# Altium PCB Layer.PcbDoc
Units mm, origin at the board's own origin, x right, y up, seen from the top; angles counter-clockwise.
Board outline 88 x 88 mm, 2 copper layers (Top Layer, Bottom Layer); 50 components, 28 nets, 154 pads, 84 vias.
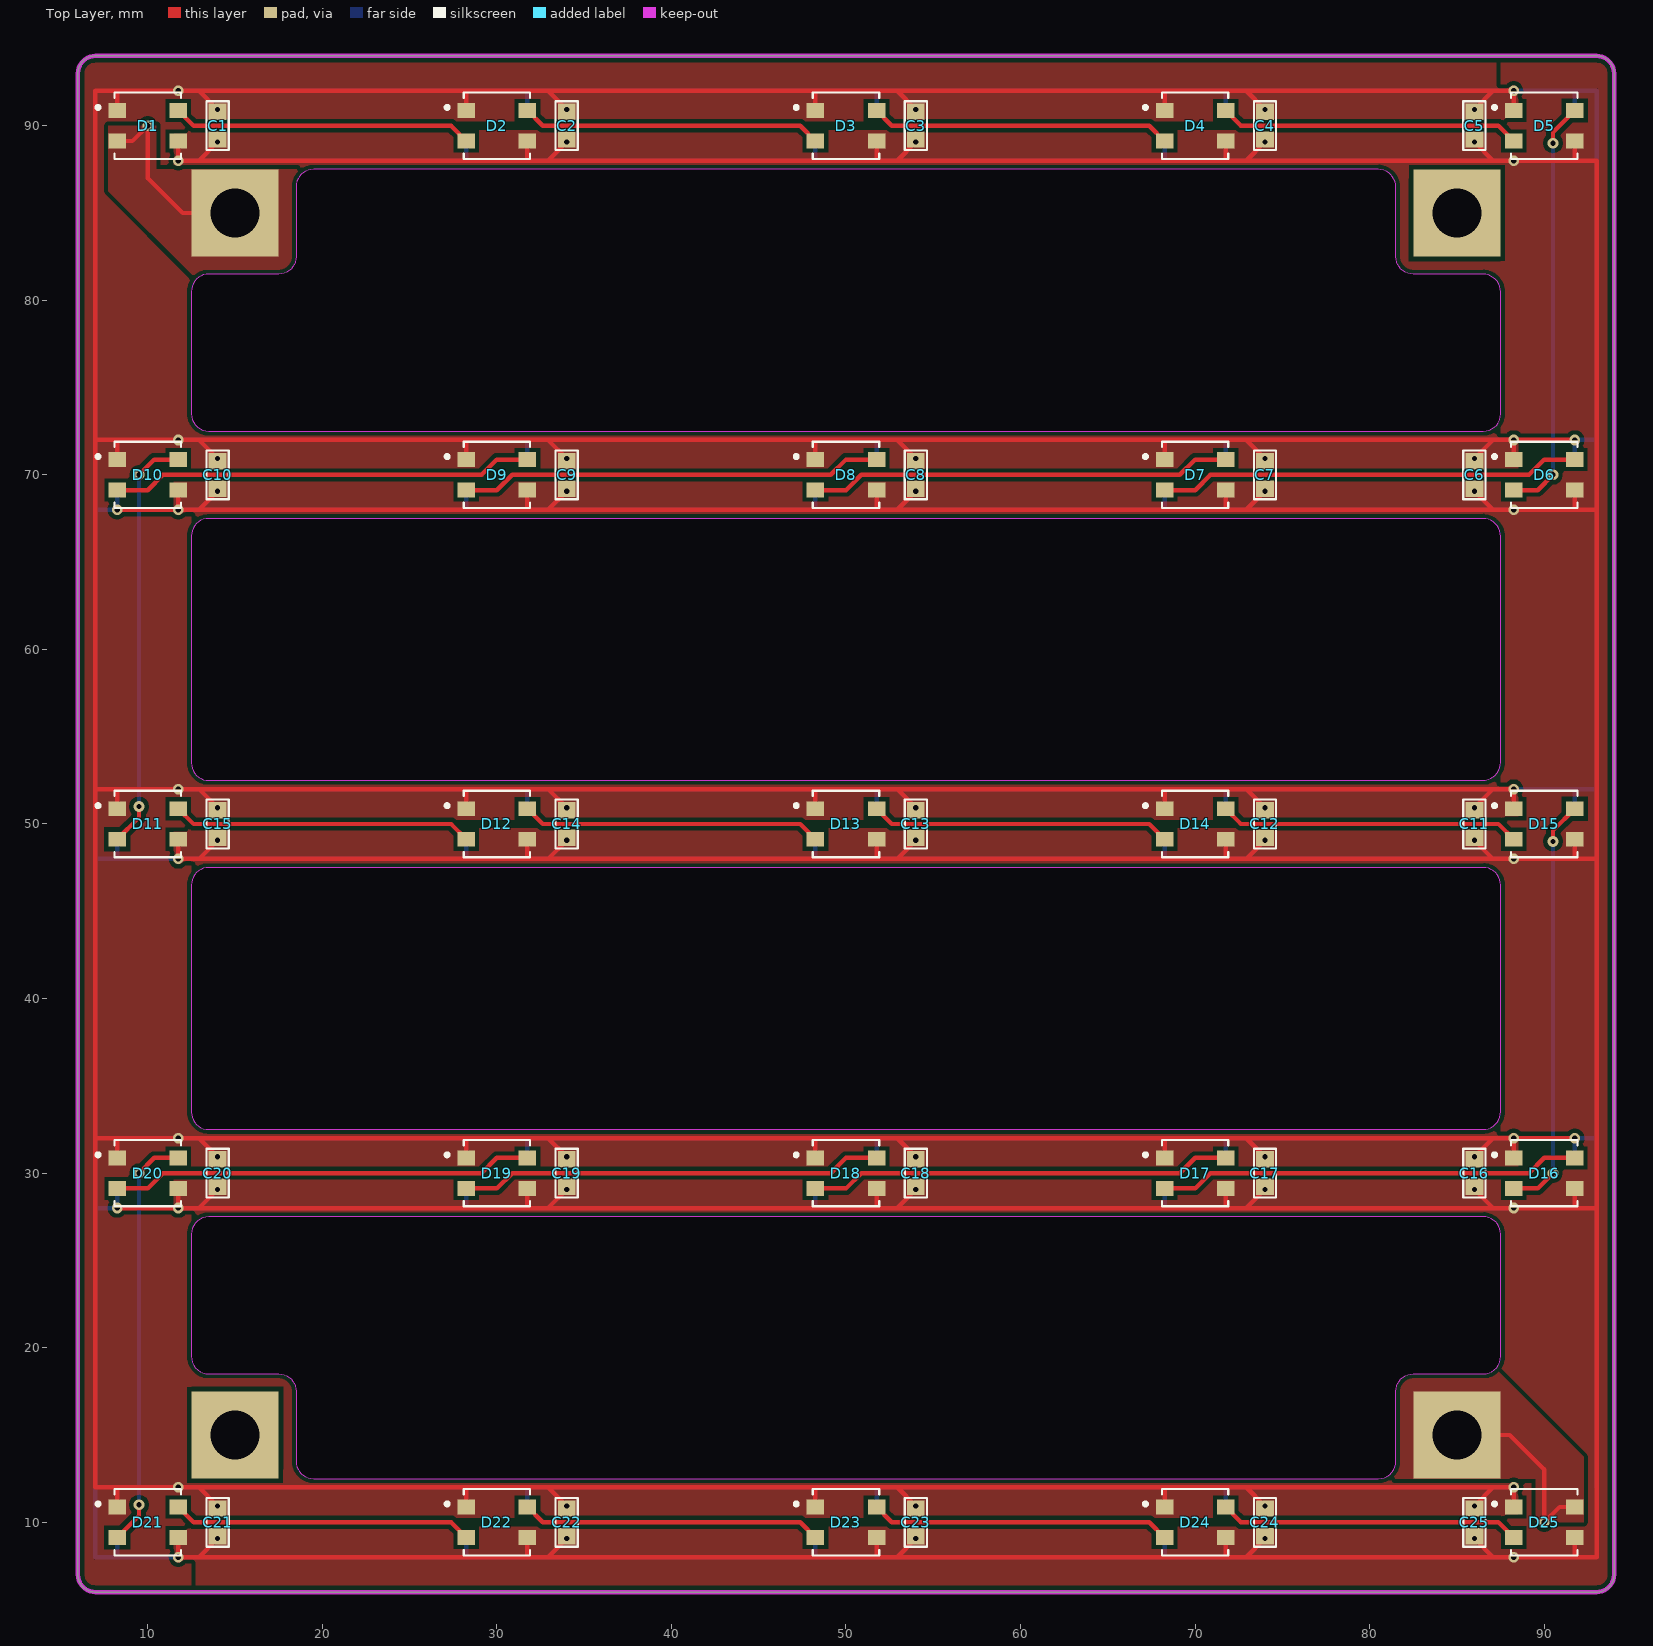
[diagram p0: Top Layer view]
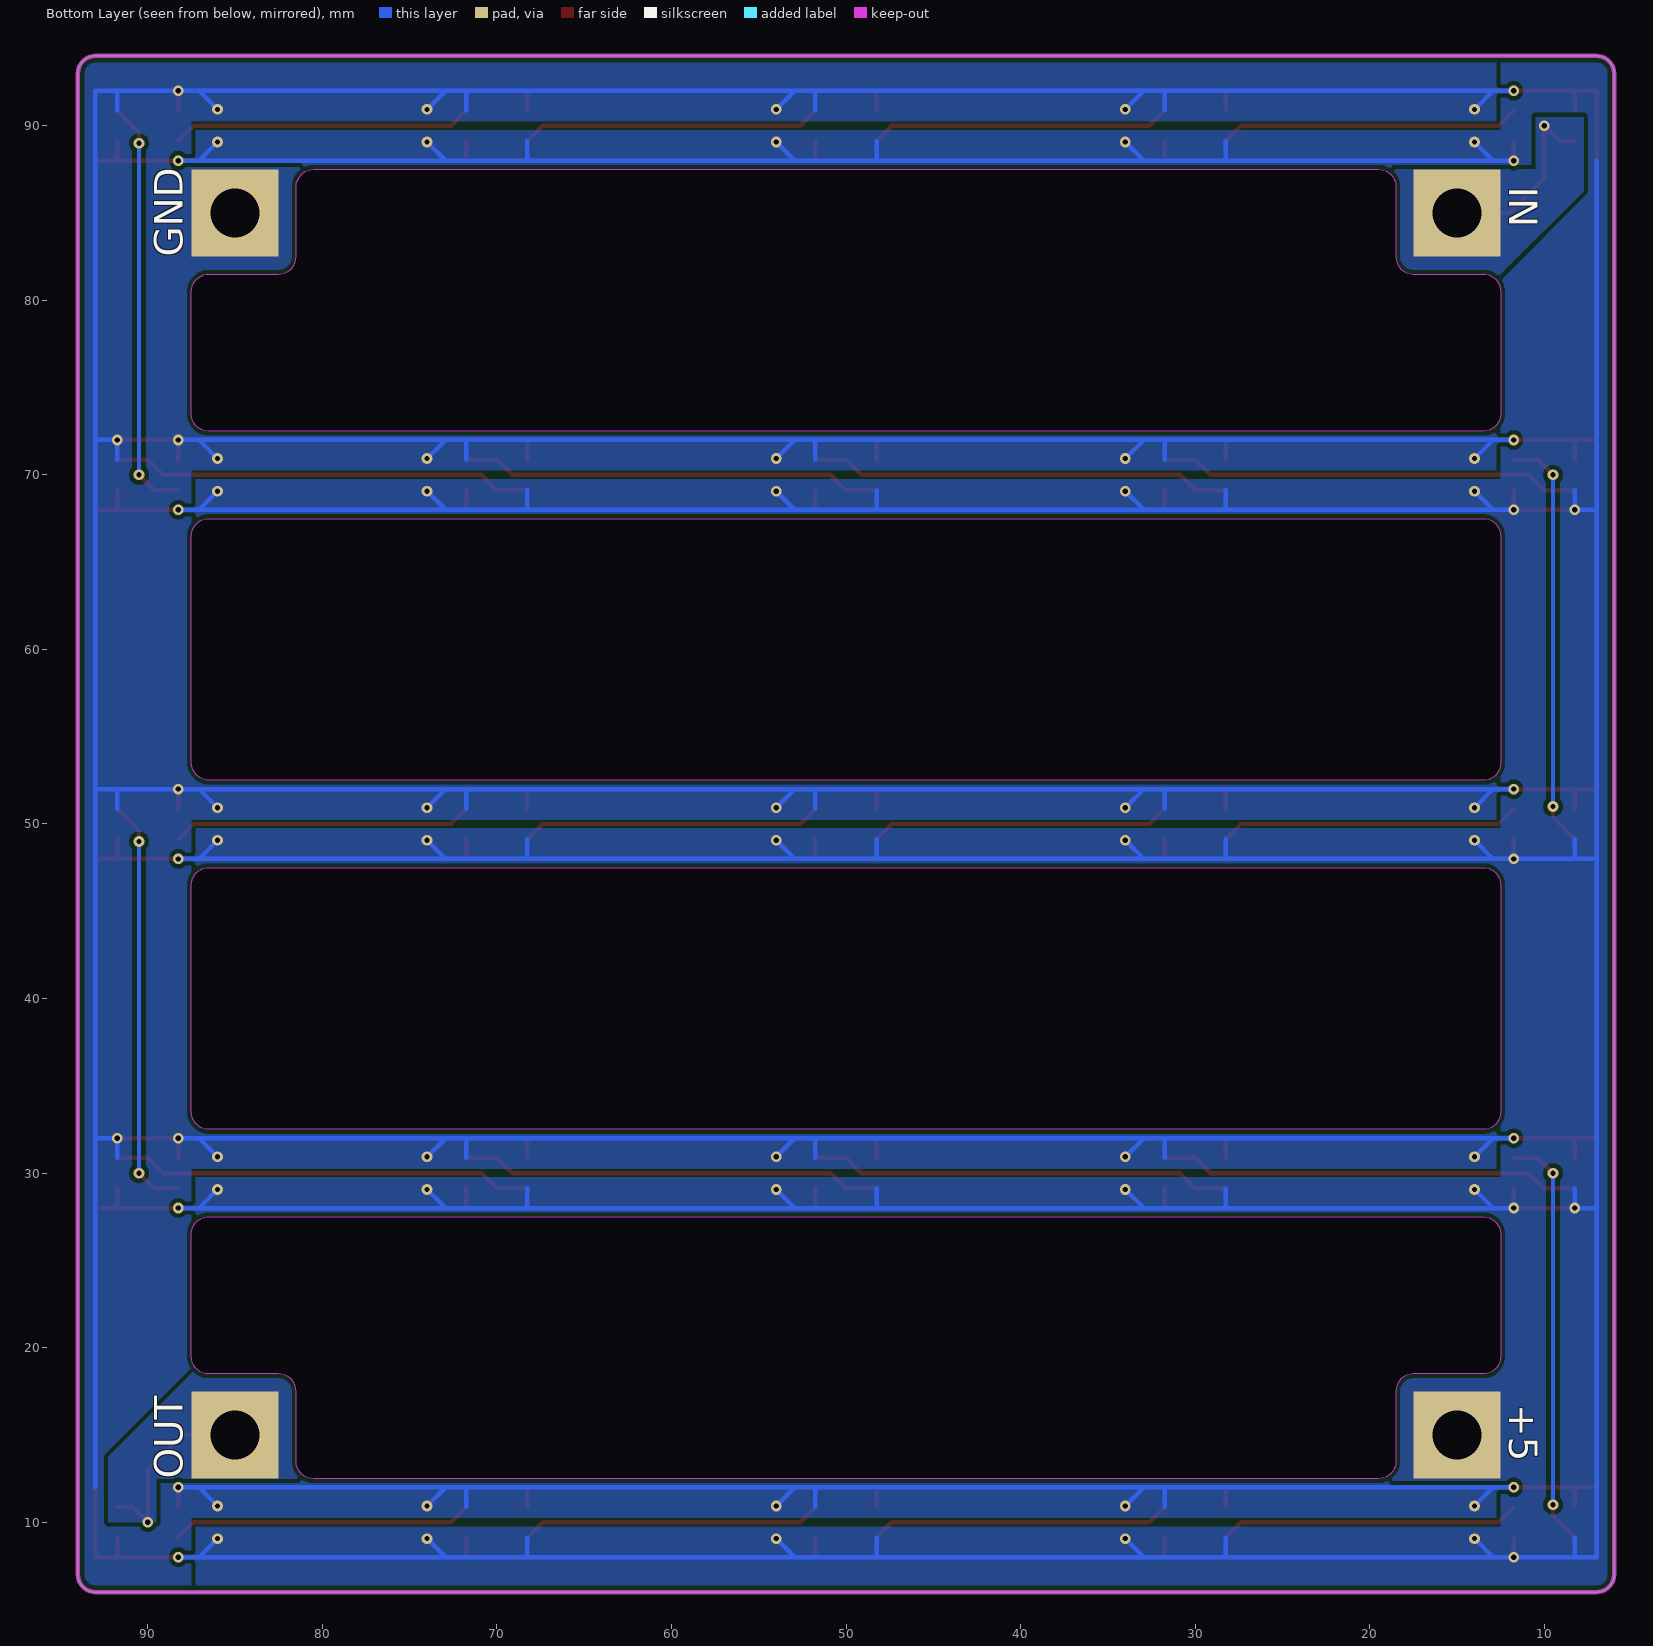
[diagram p1: Bottom Layer view, seen from below]
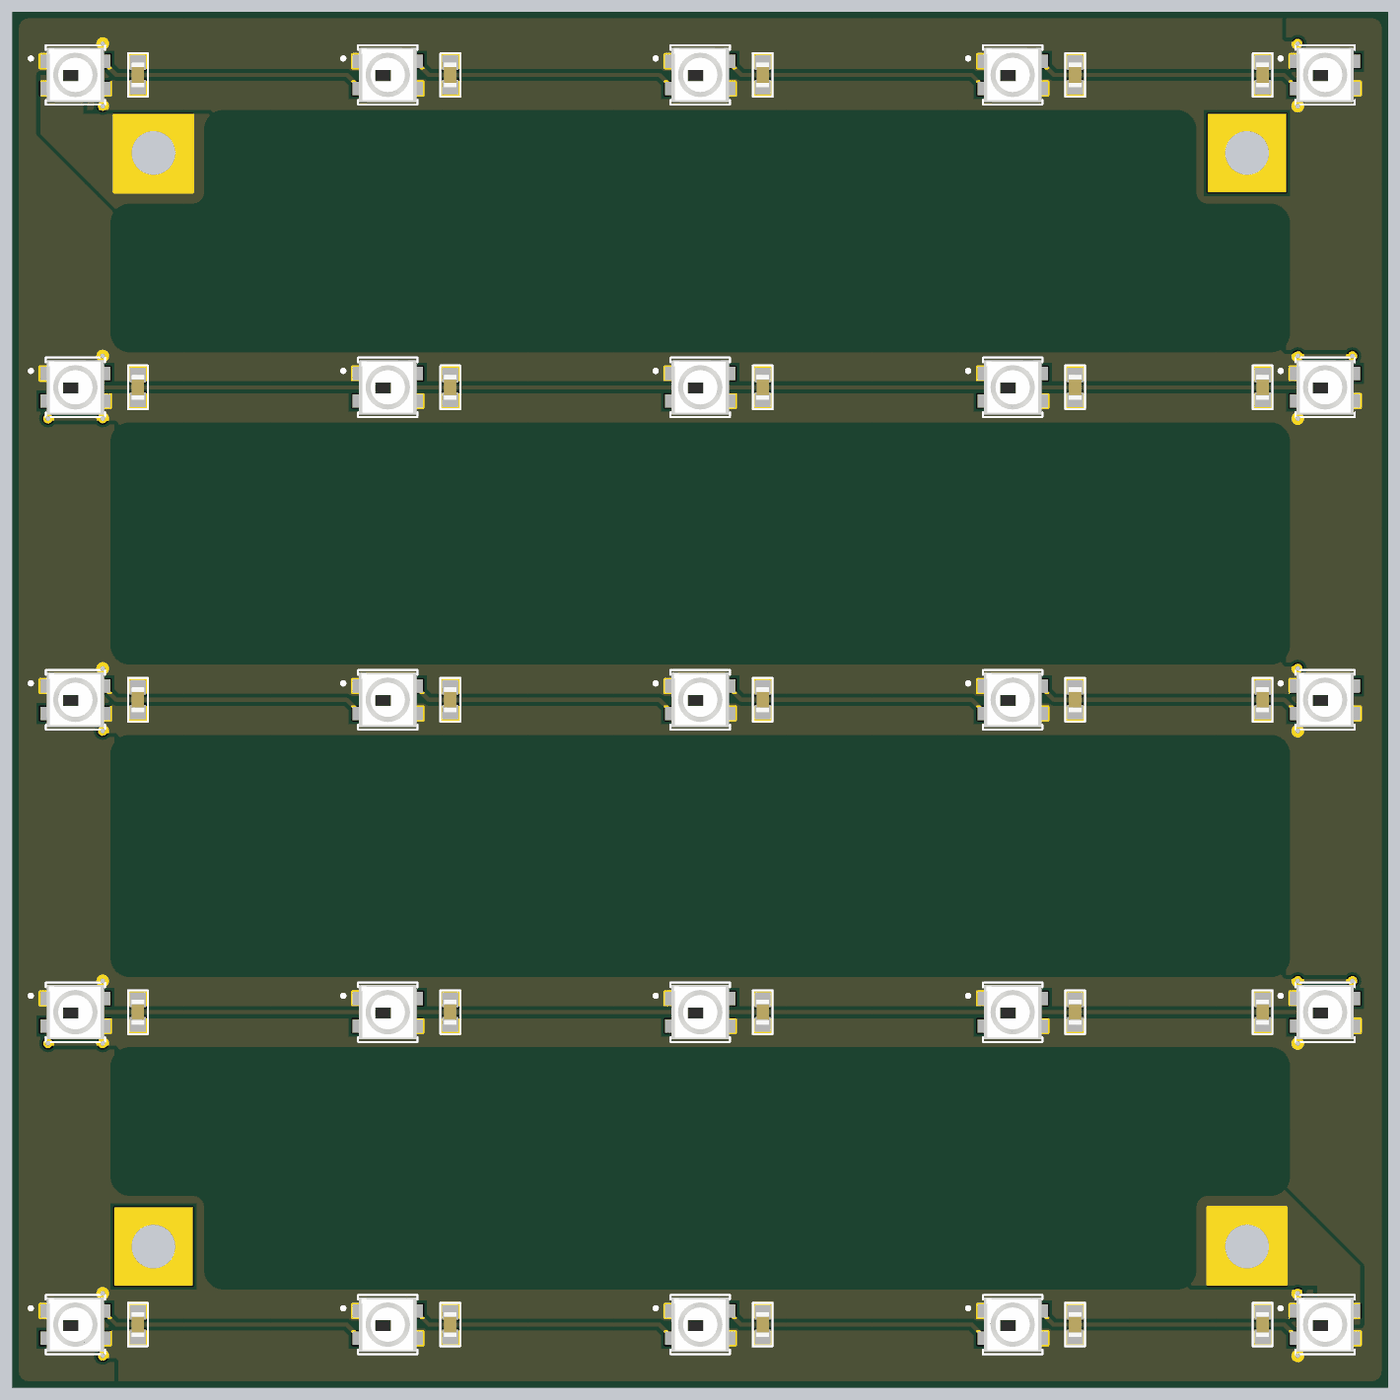
[diagram p2: 3D render of the assembled board from above, using the file's embedded part models]

## Layer stack, top to bottom
Top Solder: solder mask 0.0102, Solder Resist, Dk 3.5
Top Layer: signal copper 0.0356
Dielectric 1: dielectric 0.32, FR-4, Dk 4.8
Bottom Layer: signal copper 0.0356
Bottom Solder: solder mask 0.0102, Solder Resist, Dk 3.5

## Board outline
6,7 ccw(c7,7) 7,6 93,6 ccw(c93,7) 94,7 94,93 ccw(c93,93) 93,94 7,94 ccw(c7,93) 6,93
cut-out: 13.5,72.5 86.512,72.5 ccw(c86.512,73.488) 87.5,73.488 87.5,80.481 ccw(c86.481,80.481) 86.481,81.5 82.5,81.5 cw(c82.5,82.5) 81.5,82.5 81.5,86.481 ccw(c80.481,86.481) 80.481,87.5 19.5,87.5 ccw(c19.5,86.5) 18.5,86.5 18.5,82.5 cw(c17.5,82.5) 17.5,81.5 13.5,81.5 ccw(c13.5,80.5) 12.5,80.5 12.5,73.5 ccw(c13.5,73.5)
cut-out: 86.5,27.5 13.5,27.5 ccw(c13.5,26.5) 12.5,26.5 12.5,19.5 ccw(c13.5,19.5) 13.5,18.5 17.5,18.5 cw(c17.5,17.5) 18.5,17.5 18.5,13.5 ccw(c19.5,13.5) 19.5,12.5 80.5,12.5 ccw(c80.5,13.5) 81.5,13.5 81.5,17.5 cw(c82.5,17.5) 82.5,18.5 86.5,18.5 ccw(c86.5,19.5) 87.5,19.5 87.5,26.5 ccw(c86.5,26.5)
cut-out: 12.5,66.5 12.5,53.5 ccw(c13.5,53.5) 13.5,52.5 86.461,52.5 ccw(c86.461,53.539) 87.5,53.539 87.5,66.481 ccw(c86.481,66.481) 86.481,67.5 13.5,67.5 ccw(c13.5,66.5)
cut-out: 12.5,46.5 12.5,33.5 ccw(c13.5,33.5) 13.5,32.5 86.481,32.5 ccw(c86.481,33.519) 87.5,33.519 87.5,46.5 ccw(c86.5,46.5) 86.5,47.5 13.5,47.5 ccw(c13.5,46.5)

## Design rules (kind name [scope] priority, off if disabled: settings)
Clearance [All] p1: gap=0.152 ignorepadtopadclearanceinfootprint=FALSE
PolygonConnect [All] p1: connectstyle=Direct reliefconductorwidth=0.254 reliefentries=4 polygonreliefangle="90 Angle" airgapwidth=0.254
RoutingVias [All] p1: holewidth=0.305 width=0.61 viastyle="Through Hole" minholewidth=0.305 minwidth=0.61 maxholewidth=2.54 maxwidth=2.54
SolderMaskExpansion [All] p1: expansion=0.102
UnRoutedNet [All] p1: checkbadconnections=TRUE
Width [All] p1: maxlimit=0.508 minlimit=0.203 preferedwidth=0.254
29 further rules are at their usual default settings.

## Components (designator, comment, footprint, x,y, rotation, side; value= is the part's Value field where it differs from the comment)
C1 "CAP0603_100nF_X7R" C0603 14,90 r270 top
C2 "CAP0603_100nF_X7R" C0603 34,90 r90 top
C3 "CAP0603_100nF_X7R" C0603 54,90 r90 top
C4 "CAP0603_100nF_X7R" C0603 74,90 r90 top
C5 "CAP0603_100nF_X7R" C0603 86,90 r90 top
C6 "CAP0603_100nF_X7R" C0603 86,70 r270 top
C7 "CAP0603_100nF_X7R" C0603 74,70 r270 top
C8 "CAP0603_100nF_X7R" C0603 54,70 r270 top
C9 "CAP0603_100nF_X7R" C0603 34,70 r270 top
C10 "CAP0603_100nF_X7R" C0603 14,70 r270 top
C11 "CAP0603_100nF_X7R" C0603 86,50 r270 top
C12 "CAP0603_100nF_X7R" C0603 74,50 r270 top
C13 "CAP0603_100nF_X7R" C0603 54,50 r270 top
C14 "CAP0603_100nF_X7R" C0603 34,50 r270 top
C15 "CAP0603_100nF_X7R" C0603 14,50 r270 top
C16 "CAP0603_100nF_X7R" C0603 86,30 r270 top
C17 "CAP0603_100nF_X7R" C0603 74,30 r270 top
C18 "CAP0603_100nF_X7R" C0603 54,30 r270 top
C19 "CAP0603_100nF_X7R" C0603 34,30 r270 top
C20 "CAP0603_100nF_X7R" C0603 14,30 r270 top
C21 "CAP0603_100nF_X7R" C0603 14,10 r270 top
C22 "CAP0603_100nF_X7R" C0603 34,10 r270 top
C23 "CAP0603_100nF_X7R" C0603 54,10 r270 top
C24 "CAP0603_100nF_X7R" C0603 74,10 r270 top
C25 "CAP0603_100nF_X7R" C0603 86,10 r270 top
D1 "WS2812B-Mini" WS2812B-3535 10,90 r0 top locked
D2 "WS2812B-Mini" WS2812B-3535 30,90 r0 top locked
D3 "WS2812B-Mini" WS2812B-3535 50,90 r0 top locked
D4 "WS2812B-Mini" WS2812B-3535 70,90 r0 top locked
D5 "WS2812B-Mini" WS2812B-3535 90,90 r0 top locked
D6 "WS2812B-Mini" WS2812B-3535 90,70 r0 top locked
D7 "WS2812B-Mini" WS2812B-3535 70,70 r0 top locked
D8 "WS2812B-Mini" WS2812B-3535 50,70 r0 top locked
D9 "WS2812B-Mini" WS2812B-3535 30,70 r0 top locked
D10 "WS2812B-Mini" WS2812B-3535 10,70 r0 top locked
D11 "WS2812B-Mini" WS2812B-3535 10,50 r0 top locked
D12 "WS2812B-Mini" WS2812B-3535 30,50 r0 top locked
D13 "WS2812B-Mini" WS2812B-3535 50,50 r0 top locked
D14 "WS2812B-Mini" WS2812B-3535 70,50 r0 top locked
D15 "WS2812B-Mini" WS2812B-3535 90,50 r0 top locked
D16 "WS2812B-Mini" WS2812B-3535 90,30 r0 top locked
D17 "WS2812B-Mini" WS2812B-3535 70,30 r0 top locked
D18 "WS2812B-Mini" WS2812B-3535 50,30 r0 top locked
D19 "WS2812B-Mini" WS2812B-3535 30,30 r0 top locked
D20 "WS2812B-Mini" WS2812B-3535 10,30 r0 top locked
D21 "WS2812B-Mini" WS2812B-3535 10,10 r0 top locked
D22 "WS2812B-Mini" WS2812B-3535 30,10 r0 top locked
D23 "WS2812B-Mini" WS2812B-3535 50,10 r0 top locked
D24 "WS2812B-Mini" WS2812B-3535 70,10 r0 top locked
D25 "WS2812B-Mini" WS2812B-3535 90,10 r0 top locked

## Footprints (in the part's own frame and the unit in brackets; to place one, negate y for a bottom-side part, rotate by r counter-clockwise, add the part's x,y. Pads: shape width x height; smd on the part's side, far side on the other; paste and mask are expansions set on the pad)
C0603 [mm]
  rect 0.94x1.02 smd: 1(-0.79,0) 2(0.79,0)
  silkscreen extent -1.4,-0.64 1.4,0.64, body extent -0.8,-0.41 0.8,0.41, height 0.82
WS2812B-3535 [mm]
  rect 1x0.85 smd: 1(-1.75,0.875) 2(-1.75,-0.875) 3(1.75,-0.875) 4(1.75,0.875)
  silkscreen extent -2.95,-1.9 1.9,1.9, body extent -1.84,-1.74 1.84,1.74, height 1.96

## Part data
C1 C2 C3 C4 C5 C6 C7 C8 C9 C10 C11 C12 C13 C14 C15 C16 C17 C18 C19 C20 C21 C22 C23 C24 C25: library part CAP, "CAP0603 100nF X5R/X7R 25V", LCSC Part #=C1590, MF="Samsung Electro-Mechanics", MP=CL10B104KA8NNNC
D1 D2 D3 D4 D5 D6 D7 D8 D9 D10 D11 D12 D13 D14 D15 D16 D17 D18 D19 D20 D21 D22 D23 D24 D25: library part WS2812B-3535, "WS2812B-Mini 35x35mm", LCSC Part #=C114583, MF=Worldsemi, MP=WS2812B-Mini

## Free pads (board coordinates)
  rect 5x5 hole 2.8: ""(15,15) ""(15,85) ""(85,15) ""(85,85)

## Via types
v1: diameter 0.61, hole 0.305, Top Layer to Bottom Layer, tented both sides, 50 vias
v2: diameter 0.61, hole 0.305, Top Layer to Bottom Layer, 34 vias

## Nets (pads, with @x,y where several pads share a name; then routed paths per layer and width w, separated by ;. In a path a pad name is that pad's centre, name@x,y a point inside that pad or via, vN(x,y) a via of type N, cw(c..) or ccw(c..) an arc to the next point about the centre after c; other vN are vias at no path point)
+5: C1.2 C2.1 C3.1 C4.1 C5.1 C6.2 C7.2 C8.2 C9.2 C10.2 C11.2 C12.2 C13.2 C14.2 C15.2 C16.2 C17.2 C18.2 C19.2 C20.2 C21.2 C22.2 C23.2 C24.2 C25.2 D1.3 D2.3 D3.3 D4.3 D5.3 D6.3 D7.3 D8.3 D9.3 D10.3 D11.3 D12.3 D13.3 D14.3 D15.3 D16.3 D17.3 D18.3 D19.3 D20.3 D21.3 D22.3 D23.3 D24.3 D25.3 pad.@15,15 | length 1095.9
  Top Layer w0.254: v2(8.25,28) v2(11.75,28) ; v2(8.25,68) v2(11.75,68) ; D21.3 v2(11.75,8) 12.935,8 ; D20.3 v2(11.75,28) ; D11.3 v2(11.75,48) 12.935,48 ; D10.3 v2(11.75,68) ; D1.3 v2(11.75,88) 12.935,88 ; v1(14,9.065) 12.935,8 ; 14,28 12.935,28 ; v1(14,29.065) 12.935,28 ; v1(14,49.065) 12.935,48 ; 14,68 12.935,68 ; v1(14,69.065) 12.935,68 ; v1(14,89.065) 12.935,88 ; D22.3 31.75,8 ; D19.3 31.75,28 ; D12.3 31.75,48 ; D9.3 31.75,68 ; D2.3 31.75,88 ; v1(34,9.065) 32.935,8 ; v1(34,29.065) 32.935,28 ; v1(34,49.065) 32.935,48 ; v1(34,69.065) 32.935,68 ; v1(34,89.065) 32.935,88 ; D23.3 51.75,8 ; D18.3 51.75,28 ; D13.3 51.75,48 ; D8.3 51.75,68 ; D3.3 51.75,88 ; v1(54,9.065) 52.935,8 ; v1(54,29.065) 52.935,28 ; v1(54,49.065) 52.935,48 ; v1(54,69.065) 52.935,68 ; v1(54,89.065) 52.935,88 ; D24.3 71.75,8 ; D17.3 71.75,28 ; D14.3 71.75,48 ; D7.3 71.75,68 ; D4.3 71.75,88 ; v1(74,9.065) 72.935,8 ; v1(74,29.065) 72.935,28 ; v1(74,49.065) 72.935,48 ; v1(74,69.065) 72.935,68 ; v1(74,89.065) 72.935,88 ; v1(86,9.065) 87.065,8 ; v1(86,29.065) 87.065,28 ; v1(86,49.065) 87.065,48 ; v1(86,69.065) 87.065,68 ; v1(86,89.065) 87.065,88 ; v2(88.25,8) 87.065,8 ; D25.3 91.75,8 ; D16.3 91.75,28 ; D15.3 91.75,48 ; D6.3 91.75,68 ; D5.3 91.75,88 ; 93,28 91.75,28 ; 93,48 91.75,48 ; 93,68 91.75,68 ; v2(11.75,28) 12.935,28 ; v2(11.75,68) 12.935,68 ; 12.935,8 31.75,8 ; 12.935,28 31.75,28 ; 12.935,48 31.75,48 ; 12.935,68 31.75,68 ; 12.935,88 31.75,88 ; 31.75,8 32.935,8 ; 31.75,28 32.935,28 ; 31.75,48 32.935,48 ; 31.75,68 32.935,68 ; 31.75,88 32.935,88 ; 32.935,8 51.75,8 ; 32.935,28 51.75,28 ; 32.935,48 51.75,48 ; 32.935,68 51.75,68 ; 32.935,88 51.75,88 ; 51.75,8 52.935,8 ; 51.75,28 52.935,28 ; 51.75,48 52.935,48 ; 51.75,68 52.935,68 ; 51.75,88 52.935,88 ; 52.935,8 71.75,8 ; 52.935,28 71.75,28 ; 52.935,48 71.75,48 ; 52.935,68 71.75,68 ; 52.935,88 71.75,88 ; 71.75,8 72.935,8 ; 71.75,28 72.935,28 ; 71.75,48 72.935,48 ; 71.75,68 72.935,68 ; 71.75,88 72.935,88 ; 72.935,8 87.065,8 ; 72.935,28 87.065,28 ; 72.935,48 87.065,48 ; 72.935,68 87.065,68 ; 72.935,88 87.065,88 ; 87.065,8 91.75,8 ; 87.065,28 91.75,28 ; 87.065,48 v2(88.25,48) 91.75,48 ; 87.065,68 v2(88.25,68) 91.75,68 ; 87.065,88 v2(88.25,88) 91.75,88 ; 91.75,8 93,8 93,9.125 93,49.125 93,69.125 93,88 91.75,88
  Bottom Layer w0.254: 7,88 7,68 ; 8.25,9.125 8.25,8 ; 8.25,29.125 v2(8.25,28) 7,28 ; 8.25,49.125 8.25,48 ; 8.25,69.125 v2(8.25,68) 7,68 ; v2(11.75,28) 12.935,28 ; v2(11.75,68) 12.935,68 ; v2(11.75,88) 12.935,88 ; v1(14,9.065) 12.935,8 ; v1(14,29.065) 12.935,28 ; v1(14,49.065) 12.935,48 ; v1(14,69.065) 12.935,68 ; v1(14,89.065) 12.935,88 ; 28.25,9.125 28.25,8 ; 28.25,29.125 28.25,28 ; 28.25,49.125 28.25,48 ; 28.25,69.125 28.25,68 ; 28.25,89.125 28.25,88 ; v1(34,9.065) 32.935,8 ; v1(34,29.065) 32.935,28 ; v1(34,49.065) 32.935,48 ; v1(34,69.065) 32.935,68 ; v1(34,89.065) 32.935,88 ; 48.25,9.125 48.25,8 ; 48.25,29.125 48.25,28 ; 48.25,49.125 48.25,48 ; 48.25,69.125 48.25,68 ; 48.25,89.125 48.25,88 ; v1(54,9.065) 52.935,8 ; v1(54,29.065) 52.935,28 ; v1(54,49.065) 52.935,48 ; v1(54,69.065) 52.935,68 ; v1(54,89.065) 52.935,88 ; 68.25,9.125 68.25,8 ; 68.25,29.125 68.25,28 ; 68.25,49.125 68.25,48 ; 68.25,69.125 68.25,68 ; 68.25,89.125 68.25,88 ; v1(74,9.065) 72.935,8 ; v1(74,29.065) 72.935,28 ; v1(74,49.065) 72.935,48 ; v1(74,69.065) 72.935,68 ; v1(74,89.065) 72.935,88 ; v1(86,9.065) 87.065,8 ; v1(86,29.065) 87.065,28 ; v1(86,49.065) 87.065,48 ; v1(86,69.065) 87.065,68 ; v1(86,89.065) 87.065,88 ; v2(88.25,8) 87.065,8 ; v2(88.25,28) 87.065,28 ; v2(88.25,48) 87.065,48 ; v2(88.25,68) 87.065,68 ; v2(88.25,88) 87.065,88 ; 7,28 7,48 ; 7,28 7,9.125 7,8 8.25,8 ; 7,48 7,68 ; 7,48 8.25,48 ; 8.25,8 12.935,8 ; 8.25,48 v2(11.75,48) 12.935,48 ; 12.935,8 28.25,8 ; 12.935,28 28.25,28 ; 12.935,48 28.25,48 ; 12.935,68 28.25,68 ; 12.935,88 28.25,88 ; 28.25,8 32.935,8 ; 28.25,28 32.935,28 ; 28.25,48 32.935,48 ; 28.25,68 32.935,68 ; 28.25,88 32.935,88 ; 32.935,8 48.25,8 ; 32.935,28 48.25,28 ; 32.935,48 48.25,48 ; 32.935,68 48.25,68 ; 32.935,88 48.25,88 ; 48.25,8 52.935,8 ; 48.25,28 52.935,28 ; 48.25,48 52.935,48 ; 48.25,68 52.935,68 ; 48.25,88 52.935,88 ; 52.935,8 68.25,8 ; 52.935,28 68.25,28 ; 52.935,48 68.25,48 ; 52.935,68 68.25,68 ; 52.935,88 68.25,88 ; 68.25,8 72.935,8 ; 68.25,28 72.935,28 ; 68.25,48 72.935,48 ; 68.25,68 72.935,68 ; 68.25,88 72.935,88 ; 72.935,8 87.065,8 ; 72.935,28 87.065,28 ; 72.935,48 87.065,48 ; 72.935,68 87.065,68 ; 72.935,88 87.065,88
GND: C1.1 C2.2 C3.2 C4.2 C5.2 C6.1 C7.1 C8.1 C9.1 C10.1 C11.1 C12.1 C13.1 C14.1 C15.1 C16.1 C17.1 C18.1 C19.1 C20.1 C21.1 C22.1 C23.1 C24.1 C25.1 D1.1 D2.1 D3.1 D4.1 D5.1 D6.1 D7.1 D8.1 D9.1 D10.1 D11.1 D12.1 D13.1 D14.1 D15.1 D16.1 D17.1 D18.1 D19.1 D20.1 D21.1 D22.1 D23.1 D24.1 D25.1 pad.@85,85 | length 1094.8
  Top Layer w0.254: 7,32 8.25,32 ; D21.1 8.25,12 ; D20.1 8.25,32 ; D11.1 8.25,52 ; D10.1 8.25,72 ; D1.1 8.25,92 ; 13.5,32 12.935,32 ; v1(14,10.935) 12.935,12 ; v1(14,30.935) 12.935,32 ; v1(14,50.935) 12.935,52 ; v1(14,70.935) 12.935,72 ; v1(14,90.935) 12.935,92 ; D22.1 28.25,12 ; D19.1 28.25,32 ; D12.1 28.25,52 ; D9.1 28.25,72 ; D2.1 28.25,92 ; v1(34,10.935) 32.935,12 ; v1(34,30.935) 32.935,32 ; v1(34,50.935) 32.935,52 ; v1(34,70.935) 32.935,72 ; v1(34,90.935) 32.935,92 ; D23.1 48.25,12 ; D18.1 48.25,32 ; D13.1 48.25,52 ; D8.1 48.25,72 ; D3.1 48.25,92 ; v1(54,10.935) 52.935,12 ; v1(54,30.935) 52.935,32 ; v1(54,50.935) 52.935,52 ; v1(54,70.935) 52.935,72 ; v1(54,90.935) 52.935,92 ; D24.1 68.25,12 ; D17.1 68.25,32 ; D14.1 68.25,52 ; D7.1 68.25,72 ; D4.1 68.25,92 ; v1(74,10.935) 72.935,12 ; v1(74,30.935) 72.935,32 ; v1(74,50.935) 72.935,52 ; v1(74,70.935) 72.935,72 ; v1(74,90.935) 72.935,92 ; v1(86,10.935) 87.065,12 ; v1(86,30.935) 87.065,32 ; v1(86,50.935) 87.065,52 ; v1(86,70.935) 87.065,72 ; v1(86,90.935) 87.065,92 ; D25.1 v2(88.25,12) 87.065,12 ; D16.1 v2(88.25,32) ; D15.1 v2(88.25,52) 87.065,52 ; D6.1 v2(88.25,72) ; D5.1 v2(88.25,92) 87.065,92 ; v2(91.75,32) v2(88.25,32) ; v2(91.75,72) v2(88.25,72) ; 7,52 7,12 12.935,12 ; 7,52 7,72 ; 7,52 8.25,52 ; 7,72 7,92 8.25,92 ; 7,72 8.25,72 ; 8.25,32 v2(11.75,32) 12.935,32 ; 8.25,52 12.935,52 ; 8.25,72 v2(11.75,72) 12.935,72 ; 8.25,92 v2(11.75,92) 12.935,92 ; 12.935,12 28.25,12 ; 12.935,32 28.25,32 ; 12.935,52 28.25,52 ; 12.935,72 28.25,72 ; 12.935,92 28.25,92 ; 28.25,12 32.935,12 ; 28.25,32 32.935,32 ; 28.25,52 32.935,52 ; 28.25,72 32.935,72 ; 28.25,92 32.935,92 ; 32.935,12 48.25,12 ; 32.935,32 48.25,32 ; 32.935,52 48.25,52 ; 32.935,72 48.25,72 ; 32.935,92 48.25,92 ; 48.25,12 52.935,12 ; 48.25,32 52.935,32 ; 48.25,52 52.935,52 ; 48.25,72 52.935,72 ; 48.25,92 52.935,92 ; 52.935,12 68.25,12 ; 52.935,32 68.25,32 ; 52.935,52 68.25,52 ; 52.935,72 68.25,72 ; 52.935,92 68.25,92 ; 68.25,12 72.935,12 ; 68.25,32 72.935,32 ; 68.25,52 72.935,52 ; 68.25,72 72.935,72 ; 68.25,92 72.935,92 ; 72.935,12 87.065,12 ; 72.935,32 87.065,32 ; 72.935,52 87.065,52 ; 72.935,72 87.065,72 ; 72.935,92 87.065,92 ; 87.065,32 v2(88.25,32) ; 87.065,72 v2(88.25,72)
  Bottom Layer w0.254: v2(11.75,12) 12.935,12 ; v2(11.75,32) 12.935,32 ; v2(11.75,52) 12.935,52 ; v2(11.75,72) 12.935,72 ; v2(11.75,92) 12.935,92 ; v1(14,10.935) 12.935,12 ; v1(14,30.935) 12.935,32 ; v1(14,50.935) 12.935,52 ; v1(14,70.935) 12.935,72 ; v1(14,90.935) 12.935,92 ; 31.75,10.875 31.75,12 ; 31.75,30.875 31.75,32 ; 31.75,50.875 31.75,52 ; 31.75,70.875 31.75,72 ; 31.75,90.875 31.75,92 ; v1(34,10.935) 32.935,12 ; v1(34,30.935) 32.935,32 ; v1(34,50.935) 32.935,52 ; v1(34,70.935) 32.935,72 ; v1(34,90.935) 32.935,92 ; 51.75,10.875 51.75,12 ; 51.75,30.875 51.75,32 ; 51.75,50.875 51.75,52 ; 51.75,70.875 51.75,72 ; 51.75,90.875 51.75,92 ; v1(54,10.935) 52.935,12 ; v1(54,30.935) 52.935,32 ; v1(54,50.935) 52.935,52 ; v1(54,70.935) 52.935,72 ; v1(54,90.935) 52.935,92 ; 71,92 71.75,92 ; 71.75,10.875 71.75,12 ; 71.75,30.875 71.75,32 ; 71.75,50.875 71.75,52 ; 71.75,70.875 71.75,72 ; 71.75,90.875 71.75,92 ; 73.873,92 72.935,92 ; v1(74,10.935) 72.935,12 ; v1(74,30.935) 72.935,32 ; v1(74,50.935) 72.935,52 ; v1(74,70.935) 72.935,72 ; v1(74,90.935) 72.935,92 ; v1(86,10.935) 87.065,12 ; v1(86,30.935) 87,31.935 87,32 ; v1(86,50.935) 87.065,52 ; v1(86,70.935) 87.065,72 ; v1(86,90.935) 87.065,92 ; v2(88.25,12) 87.065,12 ; v2(88.25,32) 87,32 ; v2(88.25,72) 87.065,72 ; 91.75,30.875 v2(91.75,32) 93,32 ; 91.75,50.875 91.75,52 ; 91.75,70.875 v2(91.75,72) 93,72 ; 91.75,90.875 91.75,92 ; 93,12 93,32 ; 12.935,12 31.75,12 ; 12.935,32 31.75,32 ; 12.935,52 31.75,52 ; 12.935,72 31.75,72 ; 12.935,92 31.75,92 ; 31.75,12 32.935,12 ; 31.75,32 32.935,32 ; 31.75,52 32.935,52 ; 31.75,72 32.935,72 ; 31.75,92 32.935,92 ; 32.935,12 51.75,12 ; 32.935,32 51.75,32 ; 32.935,52 51.75,52 ; 32.935,72 51.75,72 ; 32.935,92 51.75,92 ; 51.75,12 52.935,12 ; 51.75,32 52.935,32 ; 51.75,52 52.935,52 ; 51.75,72 52.935,72 ; 51.75,92 52.935,92 ; 52.935,12 71.75,12 ; 52.935,32 71.75,32 ; 52.935,52 71.75,52 ; 52.935,72 71.75,72 ; 52.935,92 71.75,92 ; 71.75,12 72.935,12 ; 71.75,32 72.935,32 ; 71.75,52 72.935,52 ; 71.75,72 72.935,72 ; 71.75,92 72.935,92 ; 72.935,12 87.065,12 ; 72.935,32 87,32 ; 72.935,52 87.065,52 ; 72.935,72 87.065,72 ; 72.935,92 87.065,92 ; 87.065,52 v2(88.25,52) 91.75,52 ; 87.065,92 v2(88.25,92) 91.75,92 ; 91.75,52 93,52 ; 91.75,92 93,92 93,52 ; 93,32 93,52
IN: D1.2 pad.@15,85 | length 10.9
  Top Layer w0.254: D1.2 9.125,89.125 v2(10,90) 10,87 12,85 pad.@15,85
NetD1_4: D1.4 D2.2 | length 17.2
  Top Layer w0.254: D1.4 12.625,90 27.375,90 D2.2
NetD2_4: D2.4 D3.2 | length 17.2
  Top Layer w0.254: D2.4 32.625,90 47.375,90 D3.2
NetD3_4: D3.4 D4.2 | length 17.2
  Top Layer w0.254: D3.4 52.625,90 67.375,90 D4.2
NetD4_4: D4.4 D5.2 | length 17.2
  Top Layer w0.254: D4.4 72.625,90 87.375,90 D5.2
NetD5_4: D5.4 D6.2 | length 24
  Top Layer w0.254: D6.2 89.625,69.125 v2(90.5,70) ; v2(90.5,89) 90.5,89.625 D5.4
  Bottom Layer w0.254: v2(90.5,70) v2(90.5,89)
NetD6_4: D6.4 D7.2 | length 24.2
  Top Layer w0.254: D7.2 70,69.125 70.875,70 89.125,70 90,70.875 D6.4
NetD7_4: D7.4 D8.2 | length 24.2
  Top Layer w0.254: D8.2 50,69.125 50.875,70 69.125,70 70,70.875 D7.4
NetD8_4: D8.4 D9.2 | length 24.2
  Top Layer w0.254: D9.2 30,69.125 30.875,70 49.125,70 50,70.875 D8.4
NetD9_4: D9.4 D10.2 | length 24.2
  Top Layer w0.254: D10.2 10,69.125 10.875,70 29.125,70 30,70.875 D9.4
NetD10_4: D10.4 D11.2 | length 24
  Top Layer w0.254: D11.2 9.5,50.375 v2(9.5,51) ; v2(9.5,70) 10.375,70.875 D10.4
  Bottom Layer w0.254: v2(9.5,51) v2(9.5,70)
NetD11_4: D11.4 D12.2 | length 17.2
  Top Layer w0.254: D11.4 12.625,50 27.375,50 D12.2
NetD12_4: D12.4 D13.2 | length 17.2
  Top Layer w0.254: D12.4 32.625,50 47.375,50 D13.2
NetD13_4: D13.4 D14.2 | length 17.2
  Top Layer w0.254: D13.4 52.625,50 67.375,50 D14.2
NetD14_4: D14.4 D15.2 | length 17.2
  Top Layer w0.254: D14.4 72.625,50 87.375,50 D15.2
NetD15_4: D15.4 D16.2 | length 24
  Top Layer w0.254: D16.2 89.625,29.125 v2(90.5,30) ; v2(90.5,49) 90.5,49.625 D15.4
  Bottom Layer w0.254: v2(90.5,30) v2(90.5,49)
NetD16_4: D16.4 D17.2 | length 24.2
  Top Layer w0.254: D17.2 70,29.125 70.875,30 89.125,30 90,30.875 D16.4
NetD17_4: D17.4 D18.2 | length 24.2
  Top Layer w0.254: D18.2 50,29.125 50.875,30 69.125,30 70,30.875 D17.4
NetD18_4: D18.4 D19.2 | length 24.2
  Top Layer w0.254: D19.2 30,29.125 30.875,30 49.125,30 50,30.875 D18.4
NetD19_4: D19.4 D20.2 | length 24.2
  Top Layer w0.254: D20.2 10,29.125 10.875,30 29.125,30 30,30.875 D19.4
NetD20_4: D20.4 D21.2 | length 24
  Top Layer w0.254: D21.2 9.5,10.375 v2(9.5,11) ; v2(9.5,30) 10.375,30.875 D20.4
  Bottom Layer w0.254: v2(9.5,11) v2(9.5,30)
NetD21_4: D21.4 D22.2 | length 17.2
  Top Layer w0.254: D21.4 12.625,10 27.375,10 D22.2
NetD22_4: D22.4 D23.2 | length 17.2
  Top Layer w0.254: D22.4 32.625,10 47.375,10 D23.2
NetD23_4: D23.4 D24.2 | length 17.2
  Top Layer w0.254: D23.4 52.625,10 67.375,10 D24.2
NetD24_4: D24.4 D25.2 | length 17.2
  Top Layer w0.254: D24.4 72.625,10 87.375,10 D25.2
OUT: D25.4 pad.@85,15 | length 11
  Top Layer w0.254: pad.@85,15 88.026,15 90,13.026 v2(90,10) 90.875,10.875 D25.4

## Polygon pours and split planes (outlines as drawn)
+5 on Top Layer "Top Vertical Right" (solid, remove dead copper, pour order 24): 87.5,94 87.5,6 94,6 94,94
GND on Top Layer "Top GND" (solid, remove dead copper, pour order 20): 19,19 11.5,19 11.5,12 19,12
+5 on Top Layer "Top Horiz 1 +5" (solid, remove dead copper, pour order 38): 88.5,89.75 88.5,87 11.5,87 11.5,89.75
OUT on Top Layer "Top Out" (solid, remove dead copper, pour order 12): 81,19 81,12.5 89.5,12.5 89.5,10 92.25,10 92.25,13.75 87,19
GND on Top Layer "Top Vertical Left" (solid, remove dead copper, pour order 22): 12.5,6 12.5,94 6,94 6,6
IN on Top Layer "Top In" (solid, remove dead copper, pour order 8): 19,81 19,87.5 10.5,87.5 10.5,90 7.75,90 7.75,86.25 13,81
GND on Top Layer "Top Horiz 5 GND" (solid, remove dead copper, pour order 112): 11.5,10.25 11.5,13 88.5,13 88.5,10.25
+5 on Top Layer "Top Horiz 5 +5" (solid, remove dead copper, pour order 114): 11.5,9.75 88.5,9.75 88.5,6 11.5,6
GND on Top Layer "Top Horiz 1 GND" (solid, remove dead copper, pour order 36): 88.5,90.25 11.5,90.25 11.5,94 88.5,94
+5 on Top Layer "Top Horiz 4 +5" (solid, remove dead copper, pour order 106): 88.5,29.75 88.5,27 11.5,27 11.5,29.75
GND on Top Layer "Top Horiz 4 GND" (solid, remove dead copper, pour order 104): 11.5,30.252 11.5,33.002 88.5,33.002 88.5,30.252
+5 on Top Layer "Top Horiz 2 +5" (solid, remove dead copper, pour order 46): 88.5,69.75 88.5,67 11.5,67 11.5,69.75
GND on Top Layer "Top Horiz 2 GND" (solid, remove dead copper, pour order 44): 11.5,70.252 11.5,73.002 88.5,73.002 88.5,70.252
GND on Top Layer "Top Horiz 3 GND" (solid, remove dead copper, pour order 96): 11.5,50.252 11.5,53.002 88.5,53.002 88.5,50.252
+5 on Top Layer "Top Horiz 3 +5" (solid, remove dead copper, pour order 98): 88.5,49.75 88.5,47 11.5,47 11.5,49.75
+5 on Top Layer "Top +5" (solid, remove dead copper, pour order 18): 81,81 88.5,81 88.5,88 81,88
OUT on Bottom Layer "Bottom Out" (solid, remove dead copper, pour order 2): 81,19 81,12.5 89.5,12.5 89.5,10 92.25,10 92.25,13.75 87,19
IN on Bottom Layer "Bottom In" (solid, remove dead copper, pour order 0): 19,81 19,87.5 10.5,87.5 10.5,90.5 7.75,90.5 7.75,86.25 13,81
+5 on Bottom Layer "Bottom Vertical Left" (solid, remove dead copper, pour order 28): 12.5,6 12.5,94 6,94 6,6
GND on Bottom Layer "Bottom Vertical Right" (solid, remove dead copper, pour order 30): 87.5,94 87.5,6 94,6 94,94
+5 on Bottom Layer "Bottom Horiz 5 +5" (solid, remove dead copper, pour order 110): 11.5,9.75 88.5,9.75 88.5,6 11.5,6
GND on Bottom Layer "Bottom Horiz 5 GND" (solid, remove dead copper, pour order 108): 11.5,10.25 11.5,13 88.5,13 88.5,10.25
+5 on Bottom Layer "Bottom Horiz 4 +5" (solid, remove dead copper, pour order 102): 88.5,29.75 88.5,27 11.5,27 11.5,29.75
GND on Bottom Layer "Bottom Horiz 4 GND" (solid, remove dead copper, pour order 100): 11.5,30.252 11.5,33.002 88.5,33.002 88.5,30.252
+5 on Bottom Layer "Bottom Horiz 3 +5" (solid, remove dead copper, pour order 56): 88.5,49.75 88.5,47 11.5,47 11.5,49.75
GND on Bottom Layer "Bottom Horiz 3 GND" (solid, remove dead copper, pour order 54): 11.5,50.252 11.5,53.002 88.5,53.002 88.5,50.252
+5 on Bottom Layer "Bottom Horiz 2 +5" (solid, remove dead copper, pour order 42): 88.5,69.75 88.5,67 11.5,67 11.5,69.75
GND on Bottom Layer "Bottom Horiz 2 GND" (solid, remove dead copper, pour order 40): 11.5,70.252 11.5,73.002 88.5,73.002 88.5,70.252
+5 on Bottom Layer "Bottom Horiz 1 +5" (solid, remove dead copper, pour order 34): 88.5,89.75 88.5,87 11.5,87 11.5,89.75
GND on Bottom Layer "Bottom Horiz 1 GND" (solid, remove dead copper, pour order 32): 88.5,90.25 11.5,90.25 11.5,94 88.5,94
GND on Bottom Layer "Bottom +5" (solid, remove dead copper, pour order 14): 81,81 88.5,81 88.5,88 81,88
+5 on Bottom Layer "Bottom GND" (solid, remove dead copper, pour order 16): 19,19 11.5,19 11.5,12 19,12

## Keep-outs
Keep-Out Layer:
  the board outline again, w0.254

## Silkscreen, mask and mechanical layers (free items; w line width, h text height)
Bottom Overlay:
  text "IN" at 12,86.5 h1.63 r90
  text "GND" at 88,82.5 h1.63 r270
  text "+5" at 12,16.75 h1.63 r90
  text "OUT" at 88,12.5 h1.63 r270
Mechanical 1:
  the board outline again, w0.254